# EAGLE board DEPDisc Base rev1 v8 (EAGLE 9.7.0)
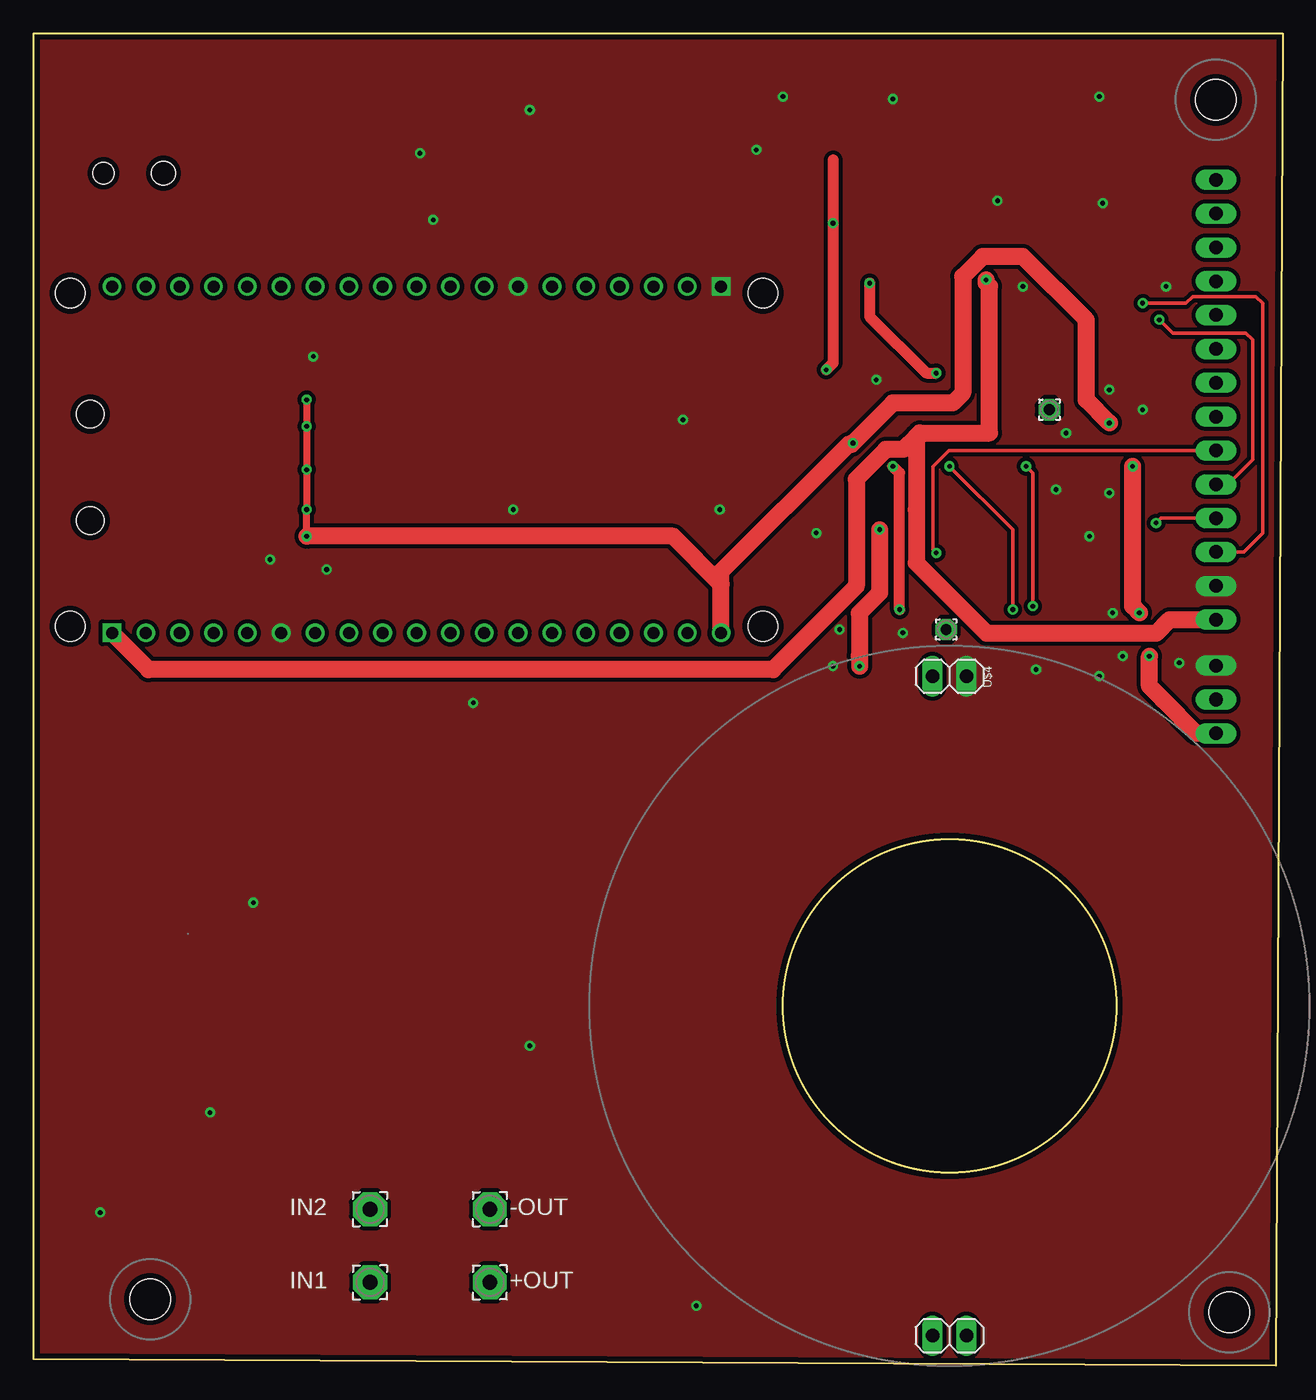
[diagram p0: board, top side]
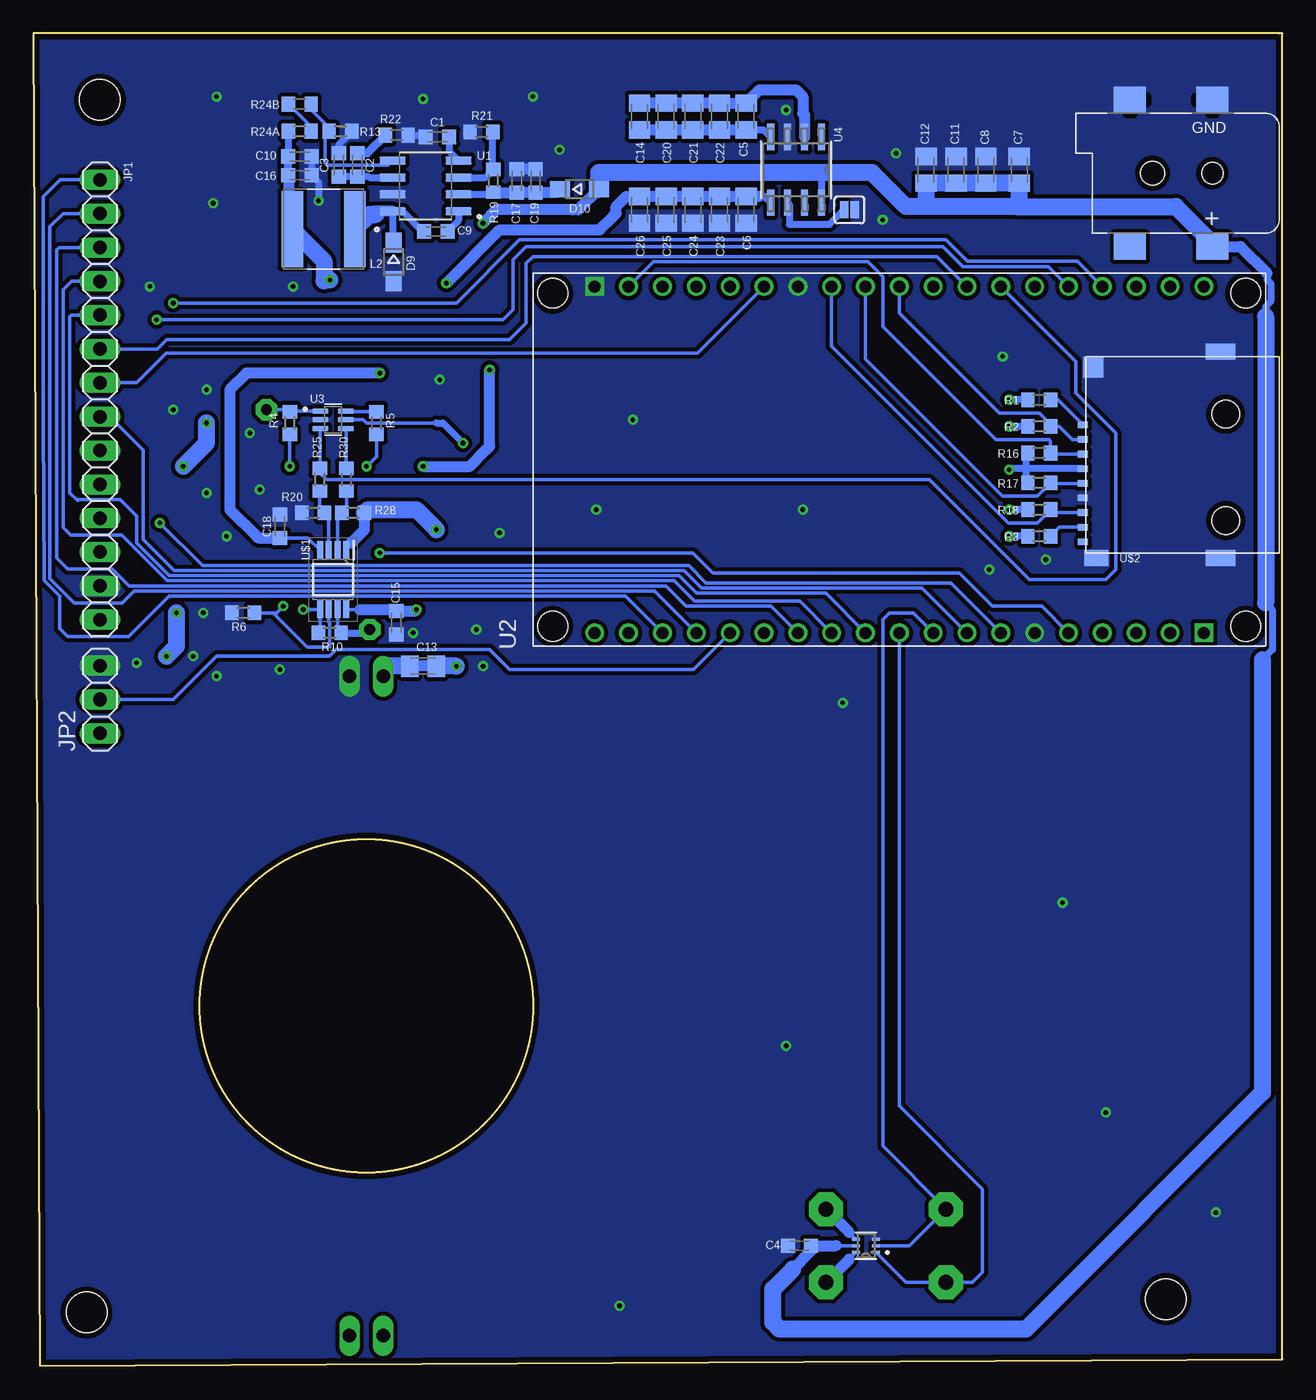
[diagram p1: board, bottom side, seen from below]

Size 93.75 x 100 mm. Coordinates in mm from the lower left corner, seen from the top.
Outline: 93.25,0 0,0.5 0,100 0.25,100 93.75,100 93.25,0
Outline: circle at 68.75,27 radius 12.5
Copper layers (1*16): Top 0.035mm / dielectric 1.5mm / Bottom 0.035mm
Design rules "Fusion Electronics Design Rules": minimum track width 10mil, minimum drill 0.35mm, track to track 5mil, track to pad 5mil, pad to pad 5mil, via to via 0.5mm, smd to smd 5mil, copper to edge 0.4mm, drill to drill 0.5mm, minimum pad ring 10mil, minimum via ring 8mil, stop-mask expansion 4mil, vias tented up to drill 0mil, thermal gap 10mil
Holes 3.05 mm at 89.75,4 88.75,95 8.75,5

## Footprints (pad centres in the part's own frame; a part is rotated, then mirrored left to right if it is on the bottom)
2,54/1,1 = drill 1.118 pad 2.54 octagon: 1 0,0
1,6/0,8 = drill 0.813 pad 1.6 octagon: 1 0,0
C0603K = smd 1.05 x 1.08: 1 -0.875,0; 2 0.875,0
C0805K = smd 1.3 x 1.6: 1 -1,0; 2 1,0
DCJACK_2MM_SMT = smd 2.4 x 2: GND 0,-5.5; GNDBREAK 6.2,-5.5; PWR1 0,5.5; PWR2 6.2,5.5 | hole 1.6: 0,0 | hole 1.8: 4.5,0
SOD323-W = smd 1.5 x 1.2: A 1.45,0; C -1.45,0
1X14 = drill 1.016 long: 1 -16.51,0; 2 -13.97,0; 3 -11.43,0; 4 -8.89,0; 5 -6.35,0; 6 -3.81,0; 7 -1.27,0; 8 1.27,0; 9 3.81,0; 10 6.35,0; 11 8.89,0; 12 11.43,0; 13 13.97,0; 14 16.51,0
1X03 = drill 1.016 long: 1 -2.54,0; 2 0,0; 3 2.54,0
SMT-JUMPER_2_NC_PASTE_SILK = smd 0.635 x 1.27: 1 -0.406,0; 2 0.406,0
IND_1255AY-6R8M=P3 = smd 1.6 x 5.7: 1 -2.35,0; 2 2.35,0
R0603 = smd 1 x 1.1: 1 -0.85,0; 2 0.85,0
SOIC127P599X175-8N = smd 1.97 x 0.6: 1 -2.47,1.905; 2 -2.47,0.635; 3 -2.47,-0.635; 4 -2.47,-1.905; 5 2.47,-1.905; 6 2.47,-0.635; 7 2.47,0.635; 8 2.47,1.905
MODULE_ESP32_NODEMCU = drill 0.9 pad 1.35 square: J4_1 13,22.86; J5_1 -13,-22.86 | drill 0.9 pad 1.35: J4_2 13,20.32; J4_3 13,17.78; J4_4 13,15.24; J4_5 13,12.7; J4_6 13,10.16; J4_7 13,7.62; J4_8 13,5.08; J4_9 13,2.54; J4_10 13,0; J4_11 13,-2.54; J4_12 13,-5.08; J4_13 13,-7.62; J4_14 13,-10.16; J4_15 13,-12.7; J4_16 13,-15.24; J4_17 13,-17.78; J4_18 13,-20.32; J4_19 13,-22.86; J5_2 -13,-20.32; J5_3 -13,-17.78; J5_4 -13,-15.24; J5_5 -13,-12.7; J5_6 -13,-10.16; J5_7 -13,-7.62; J5_8 -13,-5.08; J5_9 -13,-2.54; J5_10 -13,0; J5_11 -13,2.54; J5_12 -13,5.08; J5_13 -13,7.62; J5_14 -13,10.16; J5_15 -13,12.7; J5_16 -13,15.24; J5_17 -13,17.78; J5_18 -13,20.32; J5_19 -13,22.86 | hole 2.25: -12.5,-26; 12.5,-26; -12.5,26; 12.5,26
SOT65P210X110-6N = smd 1.19 x 0.4: 1 -0.96,0.65; 2 -0.96,0; 3 -0.96,-0.65; 4 0.96,-0.65; 5 0.96,0; 6 0.96,0.65
21-0041B_8 = smd 1.981 x 0.533: 1 -2.464,1.905; 2 -2.464,0.635; 3 -2.464,-0.635; 4 -2.464,-1.905; 5 2.464,-1.905; 6 2.464,-0.635; 7 2.464,0.635; 8 2.464,1.905
SOT5X3-6_DRL_TEX-L = smd 0.61 x 0.229: 1 -0.749,0.5; 2 -0.749,0; 3 -0.749,-0.5; 4 0.749,-0.5; 5 0.749,0; 6 0.749,0.5
SOP65P490X110-8N = smd 1.4 x 0.45: 1 -2.2,0.975; 2 -2.2,0.325; 3 -2.2,-0.325; 4 -2.2,-0.975; 5 2.2,-0.975; 6 2.2,-0.325; 7 2.2,0.325; 8 2.2,0.975
MICROSD-PUSH-OUT = smd 0.5 x 0.75: 1 9.625,0.225; 2 8.525,0.225; 3 7.425,0.225; 4 6.325,0.225; 5 5.225,0.225; 6 4.125,0.225; 7 3.025,0.225; 8 1.925,0.225; CD 0.825,0.225 | smd 1.2 x 1.8: G1 -0.375,-0.8 | smd 1.2 x 2.2: G2 -0.375,-10.1; G4 15.125,-10.1 | smd 1.6 x 1.5: G3 13.95,-0.55 | hole 2.1: 2.429,-10.496; 10.419,-10.495
1X02 = drill 1.016 long: 1 -1.27,0; 2 1.27,0

## Placement (x,y rotation side)
+OUT  [2,54/1,1]  34.25,6.25 0 top
-OUT  [2,54/1,1]  34.25,11.75 0 top
AMPIN2  [1,6/0,8]  76.25,71.75 0 top
AMPOUT2  [1,6/0,8]  68.5,55.25 0 top
C1  10nF  [C0603K]  63.42,92.23 180 bottom
C2  1nF  [C0603K]  69.43,90.11 90 bottom
C3  47pF  [C0603K]  70.82,90.11 90 bottom
C4  100nF  [C0603K]  36.25,9 180 bottom
C5  22uF  [C0805K]  40.25,93.75 90 bottom
C6  22uF  [C0805K]  40.25,86.75 90 bottom
C7  22uF  [C0805K]  19.75,89.75 270 bottom
C8  22uF  [C0805K]  22.25,89.75 270 bottom
C9  100nF  [C0603K]  63.55,85.12 0 bottom
C10  47uF  [C0603K]  73.75,90.75 0 bottom
C11  22uF  [C0805K]  24.5,89.75 270 bottom
C12  22uF  [C0805K]  26.75,89.75 270 bottom
C13  DNP  [C0805K]  64.5,52.5 0 bottom
C14  22uF  [C0805K]  48.25,93.75 90 bottom
C15  100nF  [C0603K]  66.5,55.75 270 bottom
C16  47uF  [C0603K]  73.75,89.35 0 bottom
C17  10nF  [C0603K]  57.45,88.92 90 bottom
C18  100nF  [C0603K]  75.25,63 90 bottom
C19  10uF  [C0603K]  56.06,88.92 90 bottom
C20  22uF  [C0805K]  46.25,93.75 90 bottom
C21  22uF  [C0805K]  44.25,93.75 90 bottom
C22  22uF  [C0805K]  42.25,93.75 90 bottom
C23  22uF  [C0805K]  42.25,86.75 90 bottom
C24  22uF  [C0805K]  44.25,86.75 90 bottom
C25  22uF  [C0805K]  46.25,86.75 90 bottom
C26  22uF  [C0805K]  48.25,86.75 90 bottom
CN1  DC-005-2.5A-2.0-SMT  [DCJACK_2MM_SMT]  5.25,89.5 180 bottom
D9  1N5819WS  [SOD323-W]  66.71,82.84 270 bottom
D10  1N5819WS  [SOD323-W]  52.75,88.3 0 bottom
IN1  [2,54/1,1]  25.25,6.25 0 top
IN2  [2,54/1,1]  25.25,11.75 0 top
JP1  [1X14]  88.75,72.5 270 bottom
JP2  [1X03]  88.75,50 90 bottom
JP3  JUMPER-SMT_2_NC_PASTE_SILK  [SMT-JUMPER_2_NC_PASTE_SILK]  32.5,86.75 0 bottom
L2  1255AY-6R8M=P3  [IND_1255AY-6R8M=P3]  71.97,85.28 180 bottom
R1  47k  [R0603]  18.25,72.5 0 bottom
R2  47k  [R0603]  18.25,70.5 0 bottom
R3  47k  [R0603]  18.25,62.25 0 bottom
R4  510  [R0603]  74.5,70.75 90 bottom
R5  510  [R0603]  68,70.75 90 bottom
R6  1k  [R0603]  78,56.5 0 bottom
R10  1k  [R0603]  71.5,55 0 bottom
R13  2k  [R0603]  70.7,92.65 180 bottom
R16  47k  [R0603]  18.25,68.5 0 bottom
R17  47k  [R0603]  18.25,66.25 0 bottom
R18  47k  [R0603]  18.25,64.25 0 bottom
R19  332k  [R0603]  59.23,88.92 90 bottom
R20  2k  [R0603]  72.75,64 0 bottom
R21  68.1k  [R0603]  60.12,92.61 0 bottom
R22  29.4k  [R0603]  66.47,92.36 180 bottom
R24A  10k  [R0603]  73.75,92.65 180 bottom
R24B  510  [R0603]  73.75,94.68 180 bottom
R25  750  [R0603]  72.25,66.5 90 bottom
R28  2k  [R0603]  69.75,64 0 bottom
R30  750  [R0603]  70.25,66.5 90 bottom
U1  TPS54331DR  [SOIC127P599X175-8N]  64.31,88.55 180 bottom
U2  ESP32_NODEMCU  [MODULE_ESP32_NODEMCU]  28.75,68 90 bottom
U3  SN74LVC2G04DCKR  [SOT65P210X110-6N]  71.25,71 0 bottom
U4  ICL7662EBA-T  [21-0041B_8]  36.5,89.75 270 bottom
U5  DRV8220DRLRSOT5X3-6_DRL_TEX-L  [SOT5X3-6_DRL_TEX-L]  31.25,9 180 bottom
U$1  OPA2810IDGKR  [SOP65P490X110-8N]  71.25,59 270 bottom
U$2  MICROSD-PUSH-OUT  [MICROSD-PUSH-OUT]  14.75,61 90 bottom
U$3  PINHD-1X02_1X02M  [1X02]  68.75,2.25 0 top
U$4  PINHD-1X02_1X02M  [1X02]  68.75,51.75 0 top

## Library data of the parts
+OUT -OUT AMPIN2 AMPOUT2 IN1 IN2 = wirepad
C1-C3 C9 C10 C13 C16 C17 C19 R1-R6 R10 R13 R16-R22 R24A R24B R25 R28 R30 = resistor
C4-C8 C11 C12 C14 C15 C18 C20-C26 = rcl; SPICEPREFIX: C
CN1 = adafruit
D9 D10 = diode
JP1 JP2 = pinhead
JP3 = SparkFun-Jumpers
L2 = 1255AY-6R8M=P3; AVAILABILITY: Not in stock; CHECK_PRICES: https://www.snapeda.com/parts/1255AY-6R8M=P3/Murata+Electronics+North+America/view-part/?ref=eda; DESCRIPTION: 6.8 µH Shielded Drum Core, Wirewound Inductor 3.4 A 36mOhm Nonstandard; MF: Murata Electronics; MP: 1255AY-6R8M=P3; PACKAGE: NONSTANDARD; PRICE: None; PURCHASE-URL: https://www.snapeda.com/api/url_track_click_mouser/?unipart_id=1508412&manufacturer=Murata Electronics&part_name=1255AY-6R8M=P3&search_term=1255ay-6r8m=p3; SNAPEDA_LINK: https://www.snapeda.com/parts/1255AY-6R8M=P3/Murata+Electronics+North+America/view-part/?ref=snap
U1 = TPS54331DR; AVAILABILITY: In Stock; CHECK_PRICES: https://www.snapeda.com/parts/TPS54331DR/Texas+Instruments/view-part/?ref=eda; DESCRIPTION: 3.5V to 28V Input, 3A, 570kHz Step-Down Converter with Eco-mode; MF: Texas Instruments; MP: TPS54331DR; PACKAGE: SOIC-8 Texas Instruments; PRICE: None; PURCHASE-URL: https://www.snapeda.com/api/url_track_click_mouser/?unipart_id=490779&manufacturer=Texas Instruments&part_name=TPS54331DR&search_term=tps54331dr; SNAPEDA_LINK: https://www.snapeda.com/parts/TPS54331DR/Texas+Instruments/view-part/?ref=snap
U2 = ESP32_NODEMCU; AVAILABILITY: Not in stock; CHECK_PRICES: https://www.snapeda.com/parts/ESP32%20NODEMCU/AZ-Delivery/view-part/?ref=eda; DESCRIPTION: NodeMCU is an open source loT platform. ESP32 is a series of low cost, low power system-on-chip (SoC) microcontrollers with integrated Wi-Fi & dual-mode Bluetooth.; MF: AZ Delivery; MP: ESP32 NODEMCU; PACKAGE: Package; PRICE: None; SNAPEDA_LINK: https://www.snapeda.com/parts/ESP32%20NODEMCU/AZ-Delivery/view-part/?ref=snap
U3 = SN74LVC2G04DCKR; AVAILABILITY: In Stock; CHECK_PRICES: https://www.snapeda.com/parts/SN74LVC2G04DCKR/Texas+Instruments/view-part/?ref=eda; DESCRIPTION: 2-ch, 1.65-V to 5.5-V inverters; MF: Texas Instruments; MP: SN74LVC2G04DCKR; PACKAGE: SOT-SC70-6 Texas Instruments; PRICE: None; PURCHASE-URL: https://www.snapeda.com/api/url_track_click_mouser/?unipart_id=386869&manufacturer=Texas Instruments&part_name=SN74LVC2G04DCKR&search_term=sn74lvc2g04; SNAPEDA_LINK: https://www.snapeda.com/parts/SN74LVC2G04DCKR/Texas+Instruments/view-part/?ref=snap
U4 = ICL7662EBA-T; AVAILABILITY: In Stock; CHECK_PRICES: https://www.snapeda.com/parts/ICL7662EBA+T/Analog+Devices/view-part/?ref=eda; DESCRIPTION: CMOS, Voltage Converters; MF: Analog Devices; MP: ICL7662EBA+T; PACKAGE: SOIC-8 Maxim; PRICE: None; PURCHASE-URL: https://www.snapeda.com/api/url_track_click_mouser/?unipart_id=650098&manufacturer=Analog Devices&part_name=ICL7662EBA+T&search_term=icl7662; SNAPEDA_LINK: https://www.snapeda.com/parts/ICL7662EBA+T/Analog+Devices/view-part/?ref=snap
U5 = DRV8220DRLR; COPYRIGHT: Copyright (C) 2024 Ultra Librarian. All rights reserved.; MANUFACTURER_PART_NUMBER: DRV8220DRLR; MFR_NAME: Texas Instruments; TYPE: Power Management
U$1 = OPA2810IDGKR; DESCRIPTION: High Performance Low Cost Rail-to-Rail Input/Output HV FET Op Amps; HEIGHT: 1.1mm; MANUFACTURER_NAME: Texas Instruments; MANUFACTURER_PART_NUMBER: OPA2810IDGKR; MOUSER_PART_NUMBER: 595-OPA2810IDGKR; MOUSER_PRICE-STOCK: https://www.mouser.co.uk/ProductDetail/Texas-Instruments/OPA2810IDGKR?qs=YCa%2FAAYMW02J4dMmTpJlwg%3D%3D
U$2 = TF-012-P9
U$3 U$4 = Tinkercad

## Nets
+3V3: JP2.1 R1.1 R2.1 R3.1 R16.1 R17.1 R18.1 U2.J5_19 U3.5 U$2.4
+5V: C10.1 C16.1 JP1.14 L2.2 R24A.2 U2.J5_1
+12V: C4.1 C7.2 C8.2 C11.2 C12.2 C15.1 CN1.PWR1 D10.A U4.8 U5.5 U$1.8
+IN1: R25.2 U2.J4_13 U3.3
+IN1R: R20.2 R25.1 U$1.3
+IN2: AMPIN2.1 R4.2 U3.1
+IN2R: R4.1 R6.2 U$1.6
-12V: C6.2 C18.1 C23.2 C24.2 C25.2 C26.2 U4.5 U$1.4
-IN1: R30.2 U3.4
-IN1R: R28.1 R30.1 U$1.2
-IN2: R5.2 U3.6
-IN2R: R5.1 R10.1 U$1.5
AMP1: C13.1 C13.2 R28.2 U$1.1 U$4.1
AMP2: AMPOUT2.1 R10.2 U$1.7
DAT2: R1.2 U$2.1
GND: C1.2 C3.2 C4.2 C6.1 C7.1 C8.1 C10.2 C11.1 C12.1 C15.2 C16.2 C17.2 C18.2 C19.2 C23.1 C24.1 C25.1 C26.1 CN1.GND CN1.GNDBREAK D9.A JP1.13 JP2.3 JP3.2 R6.1 R13.1 R20.1 R21.1 R22.1 U1.7 U2.J4_1 U2.J4_7 U2.J5_6 U3.2 U4.3 U5.3 U$2.6 U$2.G1 U$2.G2 U$2.G3 U$2.G4 U$4.2
IO0: U2.J4_14
IO2: JP1.10 U2.J4_15
IO5: R2.2 U2.J4_10 U$2.2
IO12: JP1.11 U2.J5_7
IO13: JP1.9 U2.J5_5
IO14: JP1.8 U2.J5_8
IO15: JP1.12 U2.J4_16
IO16: JP1.6 U2.J4_12
IO17: U2.J4_11
IO18: R17.2 U2.J4_9 U$2.5
IO19: R18.2 U2.J4_8 U$2.7
IO21: JP1.7 U2.J4_6
IO22: U2.J4_3
IO23: R16.2 U2.J4_2 U$2.3
IO25: JP1.5 U2.J5_11
IO26: IN1.1 U2.J5_10 U5.1
IO27: IN2.1 U2.J5_9 U5.2
IO32: JP1.3 U2.J5_13
IO33: JP1.4 U2.J5_12
IO34: JP2.2 U2.J5_15
IO35: U2.J5_14
IO36: JP1.1 U2.J5_17
IO39: JP1.2 U2.J5_16
N$1: C5.2 C14.2 C20.2 C21.2 C22.2 U4.2
N$2: C5.1 C14.1 C20.1 C21.1 C22.1 U4.4
N$3: +OUT.1 U5.6
N$4: -OUT.1 U5.4
N$5: JP3.1 U4.6
N$7: R19.2 R21.2 U1.3
N$8: C1.1 U1.4
N$9: R3.2 U$2.8
N$10: C2.1 C3.1 U1.6
N$11: C2.2 R22.2
N$14: R24A.1 R24B.2
N$30: C9.2 U1.1
N$35: C17.1 C19.1 D10.C R19.1 U1.2
PH: C9.1 D9.C L2.1 U1.8
VSENSE: R13.2 R24B.1 U1.5

## Tracks (layer width: path | path; a pad name or v marks a point on that pad's centre or on a via)
+3V3  (via drill 0.35)
  Top 0.508: v20.5,72.5 v20.5,70.5 v20.5,67.25 v20.5,64.25 v20.5,62.25
  Top 1.27: U2.J5_19 51.61,58.64 | 51.61,58.64 48,62.25 v20.5,62.25 | 61.4,69.15 61.17,69.15 51.61,59.59 51.61,58.64 | 61.4,69.15 v61.5,69.25 | JP2.1 87.29,47.46 84.75,50 83.75,51 v83.75,53.25 | v83,56.5 82.5,57 v82.5,67.5 | v80.75,70.75 79,72.5 79,78.5 74.25,83.25 71.25,83.25 69.75,81.75 69.75,73 69.25,72.5 69,72.25 66,72.25 64.5,72.25 61.4,69.15
  Bottom 0.254: 63.5,70.75 68.75,70.75 69,71 U3.5
  Bottom 0.508: U$2.4 19.25,67.33 | 19.25,67.33 20.42,67.33 v20.5,67.25 | R16.1 19.25,68.35 19.25,67.33 | 19.25,67.33 19.25,66.4 R17.1 | R18.1 v20.5,64.25 | R3.1 v20.5,62.25 | R2.1 v20.5,70.5 | R1.1 v20.5,72.5 | 63.5,70.75 63,70.75 v61.5,69.25
  Bottom 1.27: v83.75,53.25 83,54 v83,56.5 | v82.5,67.5 80.75,69.25 v80.75,70.75
+5V  (via drill 0.35)
  Top 1.27: U2.J5_1 8.64,52.25 55.5,52.25 61.75,58.5 61.75,66.54 63.98,68.77 65.27,68.77 66.25,69.75 | JP1.14 85.26,55.99 84.25,54.98 71.52,54.98 66.25,60.25 66.25,64.25 66.25,69.75 | v71.5,81.5 71.5,81.25 71.75,81 71.75,70 66.5,70 66.25,69.75
  Bottom 0.508: C10.1 74.62,92.62 R24A.2
  Bottom 0.61: C16.1 C10.1
  Bottom 0.813: 74.26,85.28 L2.2 74.57,85.54 74.57,89.3 C16.1
  Bottom 1.27: L2.2 71.93,82.9 71.93,81.43 71.86,81.5 v71.5,81.5
+12V  (via drill 0.35)
  Top 0.813: v65,56.75 65,67 v64.5,67.5 | 60,90.5 60,86.5 v60,85.75 60,75.25 v59.5,74.75
  Bottom 0.254: 70.22,56.75 U$1.8 70.22,56.75 | 33.5,9 U5.5 | 70.22,56.75 69.25,56.75
  Bottom 0.508: 0.76,56.75 0.75,54.19 0.75,53.75 1.5,53 | 0.76,56.75 | 1.26,57.24 0.76,56.75 | 1.26,57.24 | 1.25,78.75 1.25,79.48 0.89,79.84 0.89,81.25 1.14,81.5 1.15,82 | U4.8 34.59,89.4 34.75,89.55
  Bottom 0.813: 33.5,9 C4.1 35.38,8.62 36.75,7.25 | 1.15,82 3.15,84 CN1.PWR1 | 69.25,56.75 66.86,56.75 66.74,56.62 C15.1 65.12,56.62 v65,56.75 | v64.5,67.5 61,67.5 59.75,68.75 59.5,69 v59.5,74.75 | D10.A 52.85,86.75 53.25,86.75 59,86.75 v60,85.75
  Bottom 1.27: 20,87 8,87 5.25,84.25 CN1.PWR1 | 20,87 26.75,87 | 26.75,87 28.25,87 30.8,89.55 34.75,89.55 41.75,89.55 51.3,89.55 D10.A | 1.5,53 1.5,20.5 19.25,2.75 37.75,2.75 38.25,3.25 38.25,5.75 36.75,7.25 | 1.26,57.24 1.26,78.74 1.25,78.75 | 20,87 19.75,87.25 C7.2 C8.2 C11.2 C12.2 26.75,87
+IN1
  Bottom 0.254: U3.3 72.21,67.39 R25.2 72.25,67 71.75,66.5 26.5,66.5 19,59 13.25,59 12.5,59.75 12.5,70 15.5,73 15.5,75.37 U2.J4_13
+IN1R
  Bottom 0.254: R25.1 72.25,64.35 R20.2 71.58,63.67 U$1.3
+IN2
  Bottom 0.254: U3.1 74.45,71.65 R4.2 74.65,71.75 AMPIN2.1
+IN2R  (via drill 0.35)
  Top 0.254: v74.5,67.5 75,67 v75,57
  Bottom 0.254: U$1.6 71.58,55.83 71.5,55.75 71.5,53.95 73.2,53.95 75.76,56.5 R6.2 75.5,56.5 v75,57 | R4.1 v74.5,67.5
-12V  (via drill 0.35)
  Top 0.813: v62.75,81.25 62.75,78.75 67,74.5 v67.75,74.5
  Bottom 0.254: U$1.4 73.15,62.12 C18.1
  Bottom 0.508: 39.25,87.75 38.87,87.75 U4.5
  Bottom 0.813: v67.75,74.5 77.75,74.5 79,73.25 79,64.25 77,62.25 76.88,62.12 C18.1 | v62.75,81.25 58.75,85.25 51.25,85.25 50.25,86.25 50,86.5 50,87 49.25,87.75 C26.2 C25.2 C24.2 C23.2 C6.2 39.25,87.75
-IN1
  Bottom 0.254: U3.4 70.29,67.39 R30.2
-IN1R
  Bottom 0.254: U$1.2 70.92,63.2 70.86,63.73 R28.1 70.25,64.35 R30.1
-IN2
  Bottom 0.254: U3.6 70.24,71.6 R5.2
-IN2R  (via drill 0.35)
  Top 0.254: v68.75,67.5 73.5,62.75 v73.5,56.75
  Bottom 0.254: U$1.5 72.22,56.75 | 72.22,56.75 72.22,55.12 R10.1 | R5.1 68,68.25 v68.75,67.5 | v73.5,56.75 72.22,56.75
AMP1  (via drill 0.35)
  Top 1.27: v63.5,62.75 63.5,58 61.98,56.48 61.98,53.27 62,53.28 v62,52.5
  Bottom 0.254: U$1.1 69.9,61.58
  Bottom 0.508: 69.9,61.58 69.9,61.75
  Bottom 0.813: 69.9,61.75 68.9,62.75 R28.2 | C13.2 C13.1
  Bottom 1.27: R28.2 68.65,64.25 66.25,64.25 65,64.25 v63.5,62.75 | v62,52.5 C13.2 | C13.1 67.27,52.5 67.48,52.29 U$4.1
AMP2
  Bottom 0.254: U$1.7 70.92,55.27 R10.2
  Bottom 0.508: R10.2 68.75,55 AMPOUT2.1
DAT2
  Bottom 0.254: U$2.1 16.85,72.5 R1.2
GND  (via drill 0.35)
  Bottom 0.508: C10.2 C16.2 72.35,88.83 v72.35,87.44 | R22.1 64.42,92.36 C1.2 64.29,92.37 | 70.06,92.86 R13.1 69.83,92.63 70.82,91.63 C3.2
  Bottom 0.813: C19.2 C17.2
  other vias: 64.5,95.07 17.75,60.5 48.75,71 21,75.75 37.25,94.25 85,81 80,95.25 80.75,65.5 37.25,24 16.5,34.75 13.25,19 5,11.5 33,49.75 36,64.25 65.25,55 60,52.5 75.25,52.25 86,52.75 81,56.5 79.25,62.25 80.75,73.25 63.25,74 60.5,55.25 76.75,65.75 58.75,62.5 51.5,64.25 30,86 29,91 80,51.75 83.25,71.75 80.25,87.25 56.25,95.25 49.75,4.5 81.75,53.25 77.5,70 74.25,81 22,59.75 54.25,91.25
  pour Top (isolate 0.305, no thermals): -0.92,-1.17 95.42,-1.17 95.92,100 95.92,101.67 -0.92,101.67
  pour Bottom (isolate 0.305, no thermals): -2.67,-2.42 96.92,-2.42 96.92,102.92 -2.67,102.92
IO2  (via drill 0.35)
  Top 0.254: v84.5,78.5 85.5,77.5 91,77.5 91.5,77 91.5,68 89.65,66.15 JP1.10
  Bottom 0.254: U2.J4_15 17.55,82.5 24,82.5 25.5,84 56.75,84 57.75,83 57.75,79.25 58.5,78.5 v84.5,78.5
IO5
  Bottom 0.254: U$2.2 15.77,69.53 16.75,70.5 R2.2 17.4,70.65 18.25,71.5 21.25,71.5 28.75,79 U2.J4_10
IO12  (via drill 0.35)
  Top 0.254: v84.25,63.25 84.61,63.61 JP1.11
  Bottom 0.254: U2.J5_7 24.88,58.75 43.25,58.75 44.55,60.05 81.06,60.05 v84.25,63.25
IO13  (via drill 0.35)
  Top 0.254: v67.75,61 67.5,61.25 67.5,67.5 68.69,68.69 JP1.9
  Bottom 0.254: U2.J5_5 18.05,57 21.75,57 24.25,59.5 42.75,59.5 44.25,61 v67.75,61
IO14
  Bottom 0.254: U2.J5_8 27.04,58.37 43.62,58.37 44.92,59.67 83.17,59.67 85.5,62 85.5,68.73 88,71.23 JP1.8
IO15  (via drill 0.35)
  Top 0.254: v83.25,79.75 86.5,79.75 87,80.25 91.75,80.25 92.25,79.75 92.25,62.5 90.82,61.07 JP1.12
  Bottom 0.254: v83.25,79.75 62,79.75 57.25,84.5 25.25,84.5 23.63,82.88 15.39,82.88 U2.J4_16
IO16
  Bottom 0.254: JP1.6 84.44,76.31 83.75,77 58,77 56.75,78.25 56.75,82.75 56.25,83.25 25.92,83.25 U2.J4_12
IO18
  Bottom 0.254: U$2.5 17.38,66.22 R17.2 18.4,65.25 21,65.25 31.29,75.54 U2.J4_9
IO19
  Bottom 0.254: U$2.7 17.17,64.03 R18.2 18.4,63.25 20.57,63.25 33.83,76.51 U2.J4_8
IO21
  Bottom 0.254: U2.J4_6 43.91,76 83.77,76 86,73.77 JP1.7
IO23
  Bottom 0.254: U$2.3 17.33,68.42 R16.2 17.4,69.4 17.5,69.5 21.5,69.5 30,78 30,81.75 31.12,82.87 47.2,82.87 U2.J4_2
IO25
  Bottom 0.254: JP1.5 90.9,78.85 91,78.75 91,65.49 90.5,65 | 90.42,64.92 90.5,65 | 90.5,65 87.25,65 86,63.75 86,63.74 86,63.5 86,61.75 83.54,59.29 45.29,59.29 43.99,57.99 34.28,57.99 U2.J5_11
IO26
  Bottom 0.254: U2.J5_10 28.75,19.5 22.5,13.25 22.5,7 23.25,6.25 IN1.1 28.25,6.25 U5.1
IO27
  Bottom 0.254: U2.J5_9 27.71,56.5 29.5,56.5 30,56 30,16.5 IN2.1 28,9 U5.2
IO32
  Bottom 0.254: U2.J5_13 38.37,57 44.75,57 46.28,58.53 86.55,58.53 87.83,59.8 91.18,59.8 92,60.62 92,83.75 91.82,83.93 JP1.3
IO33
  Bottom 0.254: JP1.4 90.86,81.39 91.5,80.75 91.5,62.91 90.93,62.34 87.13,62.34 83.7,58.91 45.66,58.91 44.13,57.38 36.21,57.38 U2.J5_12
IO34
  Bottom 0.254: JP2.2 83.25,50 80,53.25 71.5,53.25 71.01,53.74 65.94,53.74 65.93,53.75 59.5,53.75 58.01,52.26 44.19,52.26 U2.J5_15
IO36
  Bottom 0.254: JP1.1 91.74,89.01 93,87.75 93,70.79 92.94,58.94 91.78,57.78 91.78,55.32 91.18,54.72 86.61,54.72 83.56,57.77 49.3,57.77 U2.J5_17
IO39
  Bottom 0.254: JP1.2 91.5,86.47 92.5,85.47 92.5,59.08 90.67,57.26 87.08,57.26 86.18,58.15 47.14,58.15 U2.J5_16
N$1
  Bottom 0.813: C14.2 C20.2 C21.2 C22.2 C5.2 39.25,95.75 36.5,95.75 36,95.25 36,94 35.87,93.86 U4.2
N$2
  Bottom 0.508: C5.1 38.94,92.75 U4.4
  Bottom 0.813: C14.1 C20.1 C21.1 C22.1 C5.1
N$3
  Bottom 0.254: U5.6 32.5,8
  Bottom 0.813: 32.5,8 +OUT.1
N$4
  Bottom 0.254: U5.4 32.5,10
  Bottom 0.813: 32.5,10 -OUT.1
N$5
  Bottom 0.508: U4.6 37.01,87.16 37.01,85.66 33.99,85.66 JP3.1
N$7
  Bottom 0.508: U1.3 59.82,89.18 R19.2 59.27,89.81 R21.2
N$8
  Bottom 0.508: C1.1 62.54,91.16 U1.4
N$9
  Bottom 0.254: R3.2 16.73,62.92 U$2.8
N$10
  Bottom 0.508: U1.6 68.5,89.18 68.55,89.23 C2.1 C3.1
N$11
  Bottom 0.61: C2.2 68.69,90.98 R22.2
N$14
  Bottom 0.254: R24A.1 72.89,92.98 R24B.2
N$30
  Bottom 0.508: C9.2 61.84,85.95 U1.1
N$35
  Bottom 0.508: U1.2 59.39,87.91 R19.1
  Bottom 0.813: D10.C 54.46,88.05 C19.1 C17.1 59.21,88.05 R19.1
PH
  Bottom 0.508: C9.1 64.52,85.12 66.04,86.64 U1.8 66.78,84.35 D9.C
  Bottom 0.813: U1.8 68.26,86.64 68.51,86.39
  Bottom 1.27: 68.03,86.39 68.51,86.39 L2.1
VSENSE
  Bottom 0.254: R24B.1 72.89,94.25 71.55,92.9 R13.2 71.84,92.36 71.84,90.24 71.71,90.11 67.12,90.11 U1.5